# Altium PCB nguonPCB.PcbDoc
Units mil, origin at the board's own origin, x right, y up, seen from the top; angles counter-clockwise.
Board outline 6000 x 4000 mil, 2 copper layers (Top Layer, Bottom Layer); 7 components, 34 nets, 18 pads, 0 vias.
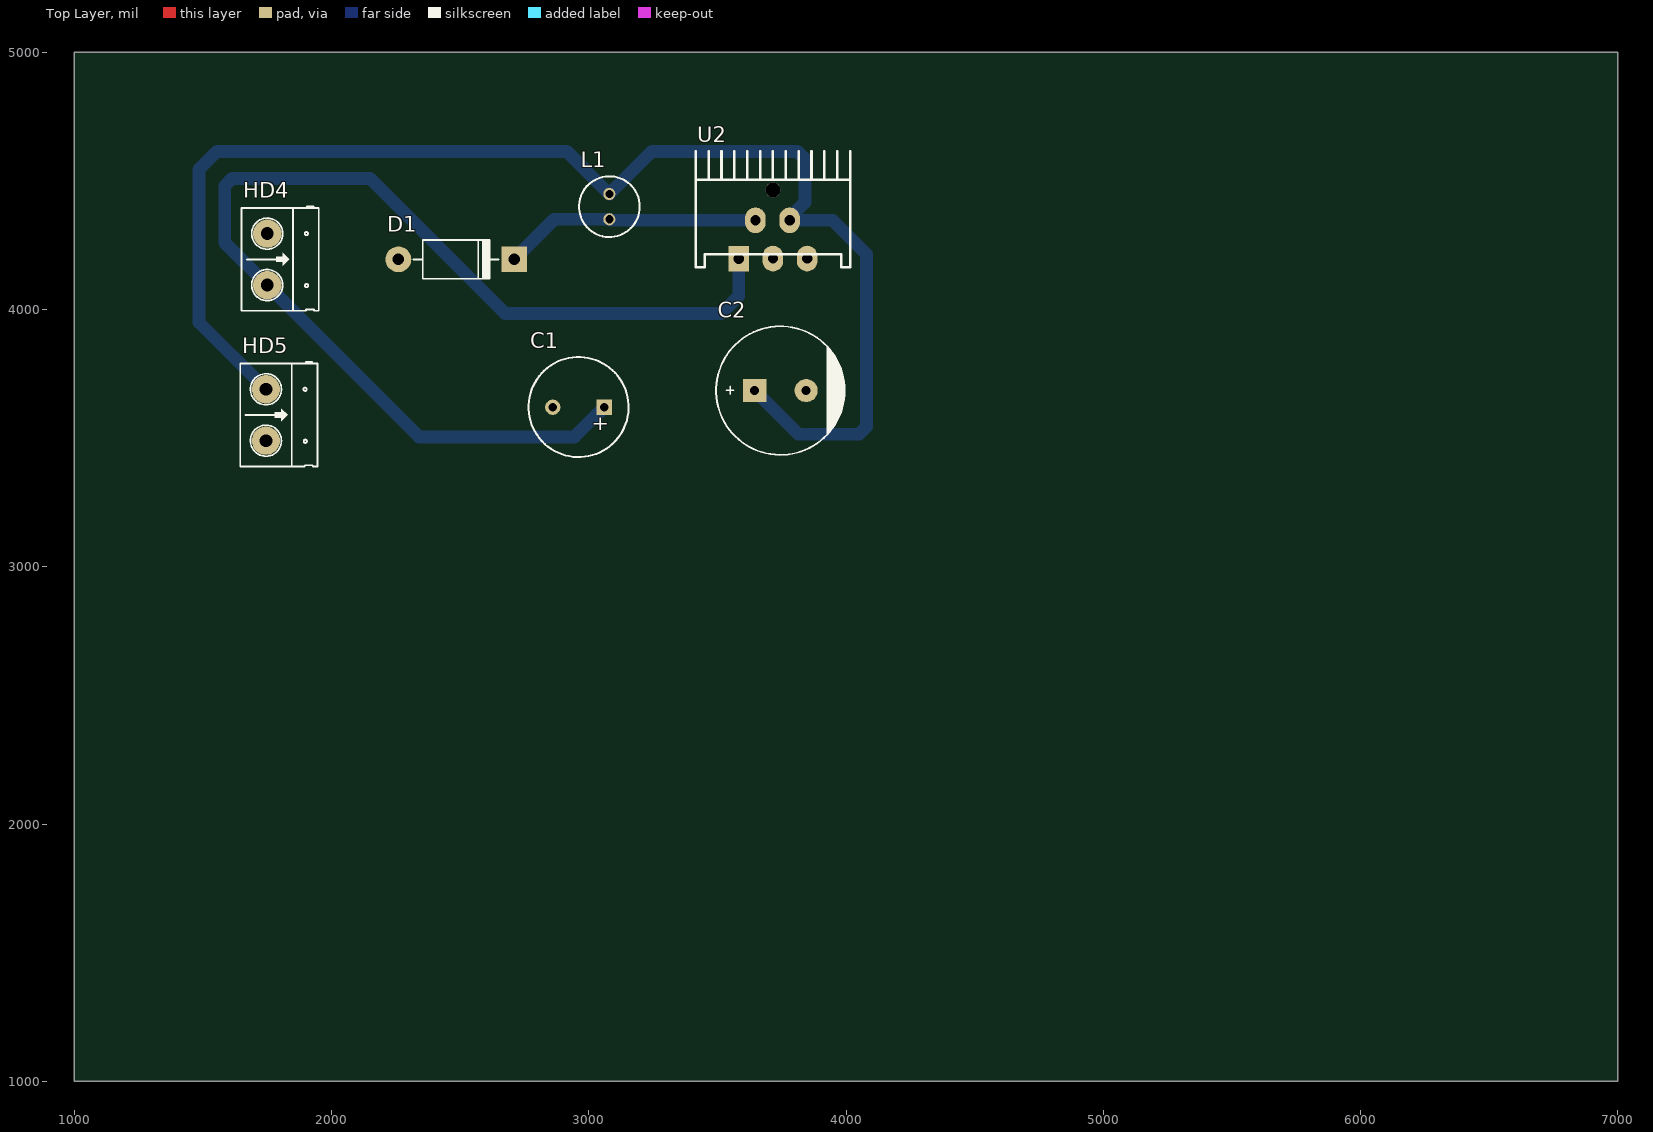
[diagram p0: Top Layer view]
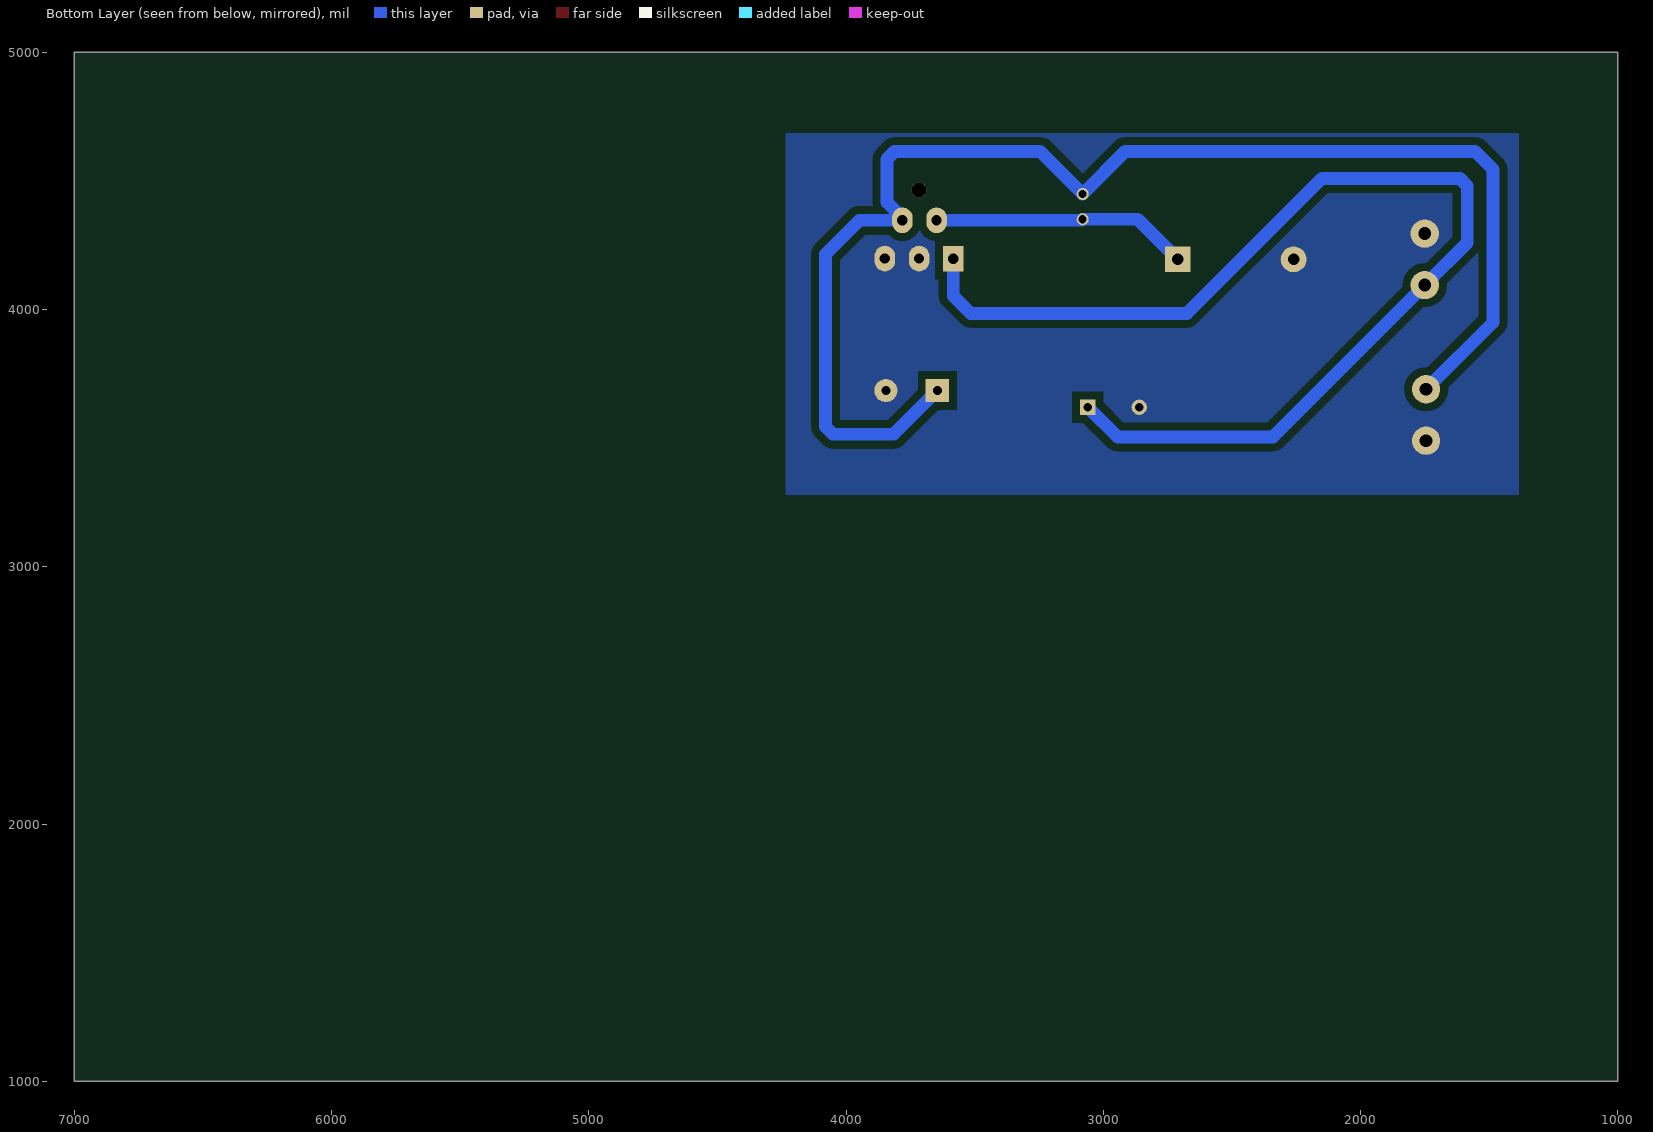
[diagram p1: Bottom Layer view, seen from below]
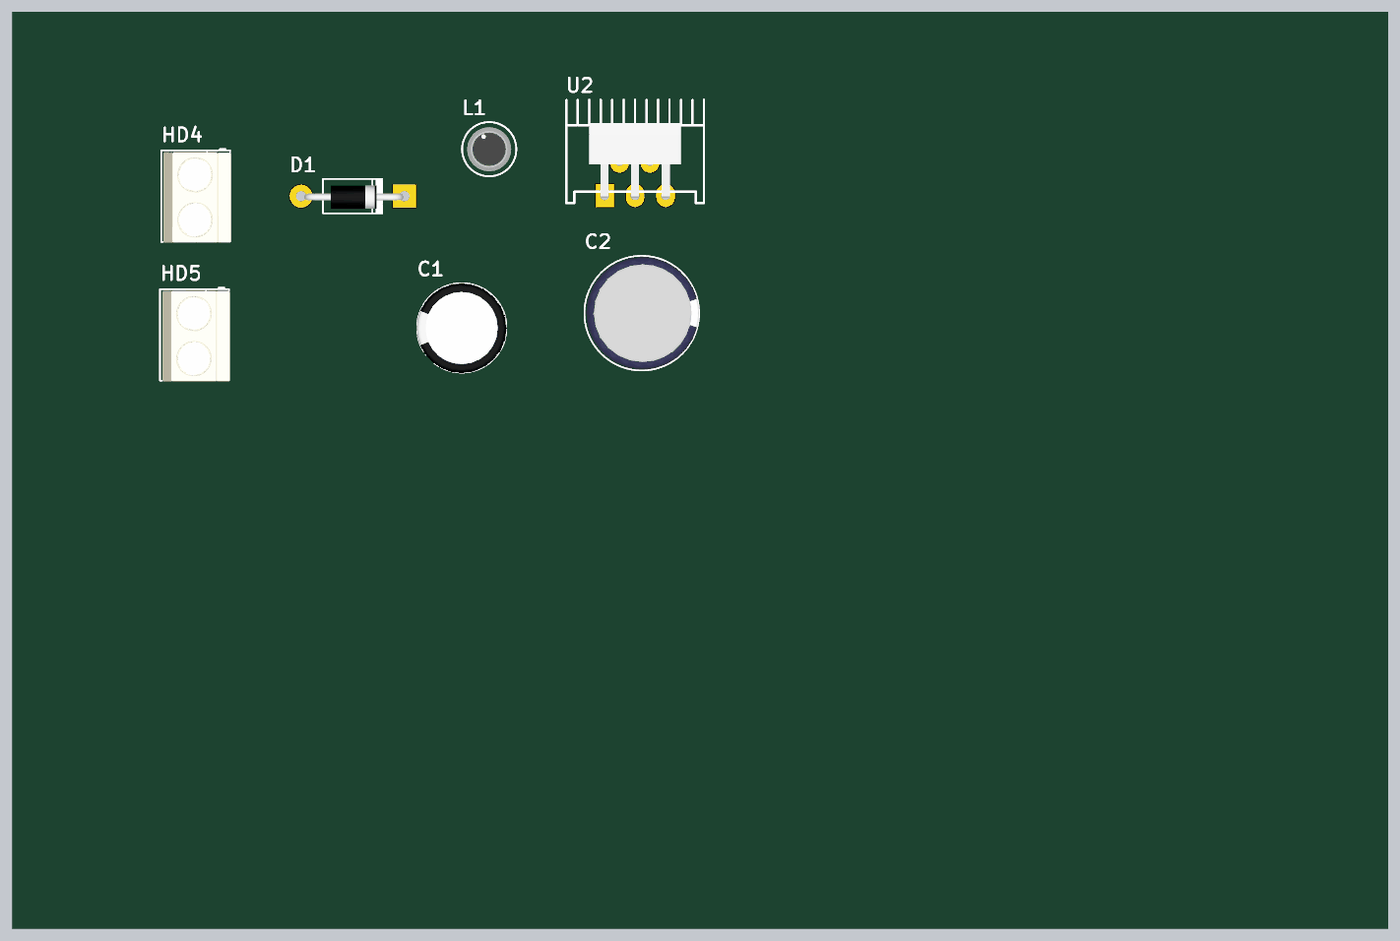
[diagram p2: 3D render of the assembled board from above, using the file's embedded part models]

## Layer stack, top to bottom
Top Solder: solder mask 0.4, Solder Resist, Dk 3.5
Top Layer: signal copper 1.4
Dielectric 1: dielectric 12.6, FR-4, Dk 4.8
Bottom Layer: signal copper 1.4
Bottom Solder: solder mask 0.4, Solder Resist, Dk 3.5

## Board outline
1000,1000 7000,1000 7000,5000 1000,5000

## Design rules (kind name [scope] priority, off if disabled: settings)
Clearance [All] p1: gap=30 ignorepadtopadclearanceinfootprint=FALSE
PlaneConnect [All] p1: planeconnectstyle=Relief reliefexpansion=20 reliefentries=4 reliefconductorwidth=20 reliefairgap=20
PolygonConnect [All] p1: connectstyle=Direct reliefconductorwidth=10 reliefentries=4 polygonreliefangle="90 Angle" airgapwidth=10
RoutingLayers [All] p1: top layer_v5=FALSE bottom layer_v5=TRUE
RoutingVias [All] p1: holewidth=28 width=50 viastyle="Through Hole" minholewidth=28 minwidth=50 maxholewidth=28 maxwidth=50
SolderMaskExpansion [All] p1: expansion=4 istentingtop=FALSE
UnRoutedNet [All] p1: checkbadconnections=TRUE
Width [All] p1: maxlimit=60 minlimit=50 preferedwidth=50
27 further rules are at their usual default settings.

## Components (designator, comment, footprint, x,y, rotation, side; value= is the part's Value field where it differs from the comment)
C1 "pol 100uF" C10mm 2960,3620 r180 top
C2 "Cap Pol3" CP2/5 3645,3685 r0 top value=C?
D1 "FR307" D2A 2710,4195 r180 top value=1N4007
HD4 "Input 12V" HED2 1750,4295 r270 top value="Header 2"
HD5 "Output 5V" HED2 1745,3690 r270 top value="Header 2"
L1 "L-DIP-1" L-DIP-M-5.3 3080,4400 r90 top value="150 mH"
U2 "LM2576T-5.0" LM2576t 3715,4365 r0 top

## Footprints (in the part's own frame and the unit in brackets; to place one, negate y for a bottom-side part, rotate by r counter-clockwise, add the part's x,y. Pads: shape width x height; smd on the part's side, far side on the other; paste and mask are expansions set on the pad)
C10mm [mm]
  rect 1.5x1.5 hole 0.8: 1(-2.54,0)
  round 1.5 hole 0.8: 2(2.54,0)
  silkscreen extent -4.95,-4.96 4.93,4.92, body extent -5,-5 4.97,5, height 20.01
CP2/5 [mil] "Tu hoa 1000uF/25V,50V"
  rect 90x90 hole 35: 1(0,0)
  round 90 hole 35: 2(200,0)
  silkscreen extent -150,-250 350,250, body extent -142,-246 350,246, height 984
D2A [mil] "Diode 2A, W 150mil, L 450mil"
  round 100 hole 45: 1(450,0)
  rect 100x100 hole 45: 2(0,0)
  silkscreen extent 61,-75 391,75, body extent 5,-47 435,54, height 100
HED2 [mil] "Header 2, 2 pin, hight 300mil, Pin to Pin 200, Colour Green"
  round 110 hole 50: 1(0,0) 2(200,0)
  silkscreen extent -106,-100 300,200, body extent -92,-90 302,205, height 394
L-DIP-M-5.3 [mm] "THT Inductor, 2-Leads, Body 5.3  mm"
  round 1.2 hole 0.8: 1(-1.25,0) 2(1.25,0)
  silkscreen extent -3,-3 3,3, body extent -2.44,-2.44 2.44,2.45, height 7.6
LM2576t [mil]
  rect 80x100 hole 40: 1(-132,-167.09)
  oval 80x100 hole 40: 2(-67,-18) 3(1,-167) 4(66,-18) 5(134,-167)
  round 59.06 hole 59.06: ""(1,100)
  silkscreen extent -299,-200 301,250, body extent -199,-175 201,150, height 859

## Part data
C1: library part "Cap Pol 12mm", "Polarized Capacitor (Axial)", LatestRevisionDate=17-Jul-2002, LatestRevisionNote="Re-released for DXP Platform.", PackageReference=POLAR0.8, Published=8-Jun-2000, Publisher="Altium Limited"
C2: "Polarized Capacitor (Surface Mount)", LatestRevisionDate=17-Jul-2002, LatestRevisionNote="Re-released for DXP Platform.", PackageReference=C0805, Publisher="Altium Limited"
D1: library part D1A, "Diode 1A"
HD4 HD5: library part Hed2, "Header 2 (Green)"
L1: "Inductor"
U2: "SIMPLE SWITCHER; 3A Step-Down Voltage Regulator", DigiKeyPartNumber=LM2576T-5.0-ND, Manufacturer="National Semiconductor", PackageTopMarking="NSUZXYTT*LM2576T*-5.0 P+", PowerWise=N, Code_JEDEC=TO-220-AB, ComponentLink1Description="LM2576 Datasheet", ComponentLink1URL=http://www.national.com/ds/LM/LM2576.pdf, ComponentLink2Description="LM2576 Web Page", ComponentLink2URL=http://www.national.com/pf/LM/LM2576.html, ComponentLink3Description="T05A Package Page", ComponentLink3URL=http://www.national.com/packaging/folders/t05a.html, CompType=Switcher, DatasheetVersion=Aug-2004, FirstPublished=4-Dec-2008, PackageDescription="TO-220, Molded, 5 Lead, Straight", PackageReference=T05A, PackageVersion="revJ, Jan-1992", PartNumber=LM2576T-5.0, PinCount=5, Publisher="Altium Limited", RoHS=O

## Nets (pads, with @x,y where several pads share a name; then routed paths per layer and width w, separated by ;. In a path a pad name is that pad's centre, name@x,y a point inside that pad or via, vN(x,y) a via of type N, cw(c..) or ccw(c..) an arc to the next point about the centre after c; other vN are vias at no path point)
+5: 
+12: 
GND: C1.2 C2.2 D1.1 HD4.1 HD5.2 U2.3 U2.5
NetC1_1: C1.1 HD4.2 U2.1 | length 4456.7
  Bottom Layer w50: C1.1 2945,3505 2340,3505 HD4.2 1585,4260 1585,4480.71 1614.29,4510 2150,4510 2675,3985 3515,3985 3583,4053 U2.1
NetC2_1: C2.1 HD5.1 L1.2 U2.4 | length 5301.3
  Bottom Layer w50: HD5.1 1485,3950 1485,4545 1555,4615 2914.21,4615 L1.2 3245.79,4615 3810.71,4615 3840,4585.71 3840,4416 3790.8,4366.8 3790.8,4356.8 U2.4 3948,4347 4080,4215 4080,3544.29 4050.71,3515 3815,3515 C2.1
NetC3_1: 
NetC5_1: 
NetD1_2: D1.2 L1.1 U2.2 | length 1004.1
  Bottom Layer w50: D1.2 2865.79,4350.79 L1.1 3083.79,4347 U2.2
NetD2_1: 
NetD3_1: 
NetDIO1_1: 
NetDIO2_1: 
NetHD2_1: 
NetHD2_2: 
NetHD3_1: 
NetHD3_2: 
NetJP4_1: 
NetJP4_2: 
NetP1_1: 
NetP1_2: 
NetP1_3: 
NetP2_1: 
NetP2_2: 
NetP2_3: 
NetR2_1: 
NetR5_1: 
NetR8_2: 
NetR9_2: 
NetR10_2: 
NetR11_2: 
NetR14_2: 
NetR15_2: 
NetU1_4: 
NetU1_8: 
pads on no net: U2.

## Polygon pours and split planes (outlines as drawn)
GND on Bottom Layer "GND_L02_P061" (solid, remove dead copper, pour order 61): 1390,4685 4235,4685 4235,3280 1385,3280 1385,4690
no net on Bottom Layer "NONET_L02_P059" (solid, pour order 59): 7380,485
no net on Bottom Layer "NONET_L02_P058" (solid, pour order 58): 4300,465
no net on Bottom Layer "NONET_L02_P057" (solid, pour order 57): 7360,2880
no net on Bottom Layer "NONET_L02_P056" (solid, pour order 56): 10585,-1470
no net on Bottom Layer "NONET_L02_P055" (solid, pour order 55): 7460,-1460
no net on Bottom Layer "NONET_L02_P054" (solid, pour order 54): 7390,-1455
no net on Bottom Layer "NONET_L02_P053" (solid, pour order 53): 4265,-1445
no net on Bottom Layer "NONET_L02_P050" (solid, pour order 50): 7365,2495
no net on Bottom Layer "NONET_L02_P048" (solid, pour order 48): 7345,4890
no net on Bottom Layer "NONET_L02_P047" (solid, pour order 47): 10570,540
no net on Bottom Layer "NONET_L02_P046" (solid, pour order 46): 7445,550
no net on Bottom Layer "NONET_L02_P045" (solid, pour order 45): 7375,555
no net on Bottom Layer "NONET_L02_P044" (solid, pour order 44): 4250,565
no net on Bottom Layer "NONET_L02_P041" (solid, pour order 41): 4285,490
no net on Bottom Layer "NONET_L02_P040" (solid, pour order 40): 1205,470
no net on Bottom Layer "NONET_L02_P038" (solid, pour order 38): 7490,-1465
no net on Bottom Layer "NONET_L02_P037" (solid, pour order 37): 4365,-1455
no net on Bottom Layer "NONET_L02_P036" (solid, pour order 36): 4295,-1450
no net on Bottom Layer "NONET_L02_P035" (solid, pour order 35): 1170,-1440
no net on Bottom Layer "NONET_L02_P025" (solid, pour order 25): 7460,555
no net on Bottom Layer "NONET_L02_P024" (solid, pour order 24): 4335,565
no net on Bottom Layer "NONET_L02_P020" (solid, pour order 20): 4265,570
no net on Bottom Layer "NONET_L02_P019" (solid, pour order 19): 1140,580

## Text inside footprints (layer, text, board x,y; h text height)
C1: Top Overlay "+" at 3080,3580 h60 r180